# Altium PCB PCB1.PcbDoc
Units mil, origin at the board's own origin, x right, y up, seen from the top; angles counter-clockwise.
Board outline 1889.76 x 1889.76 mil, 2 copper layers (Top Layer, Bottom Layer); 87 components, 85 nets, 372 pads, 223 vias.
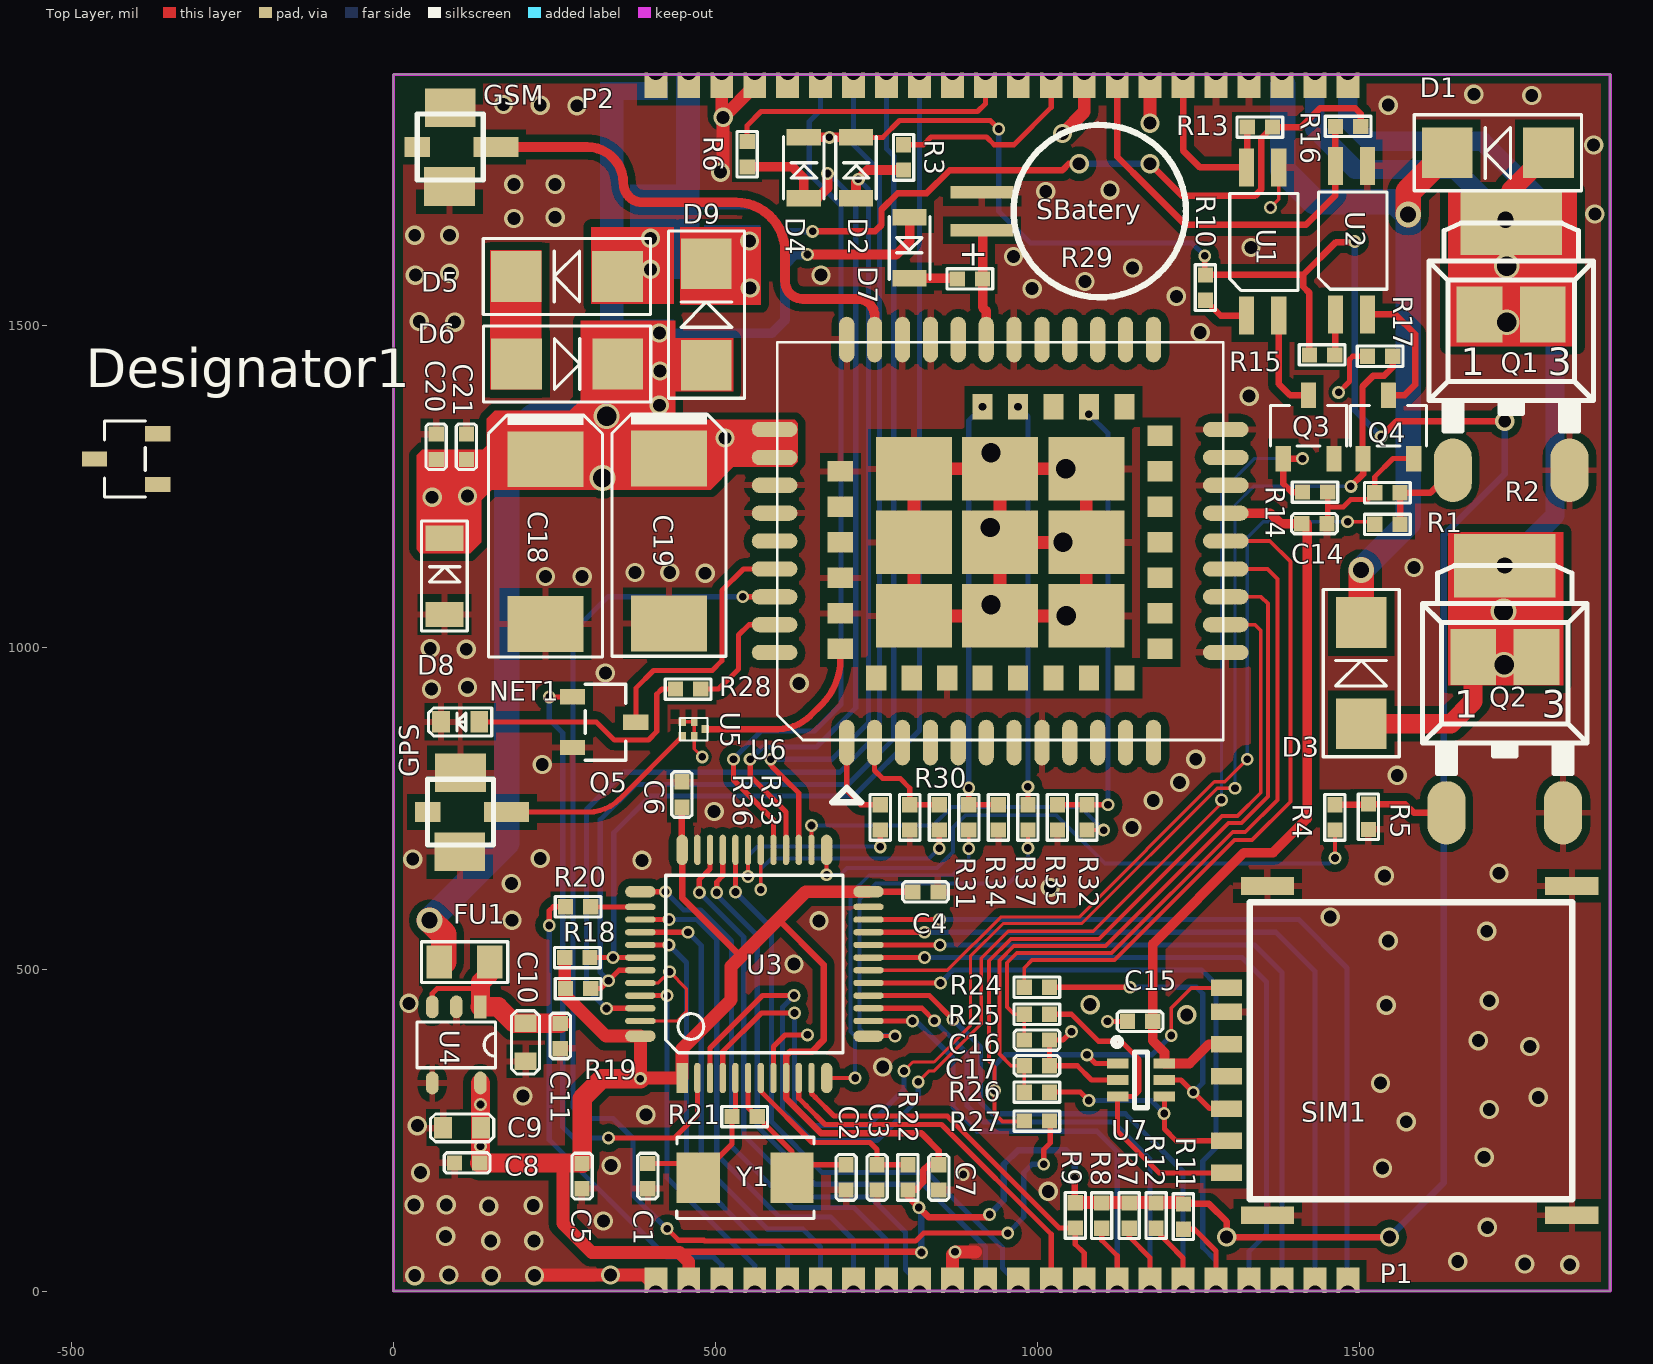
[diagram p0: Top Layer view]
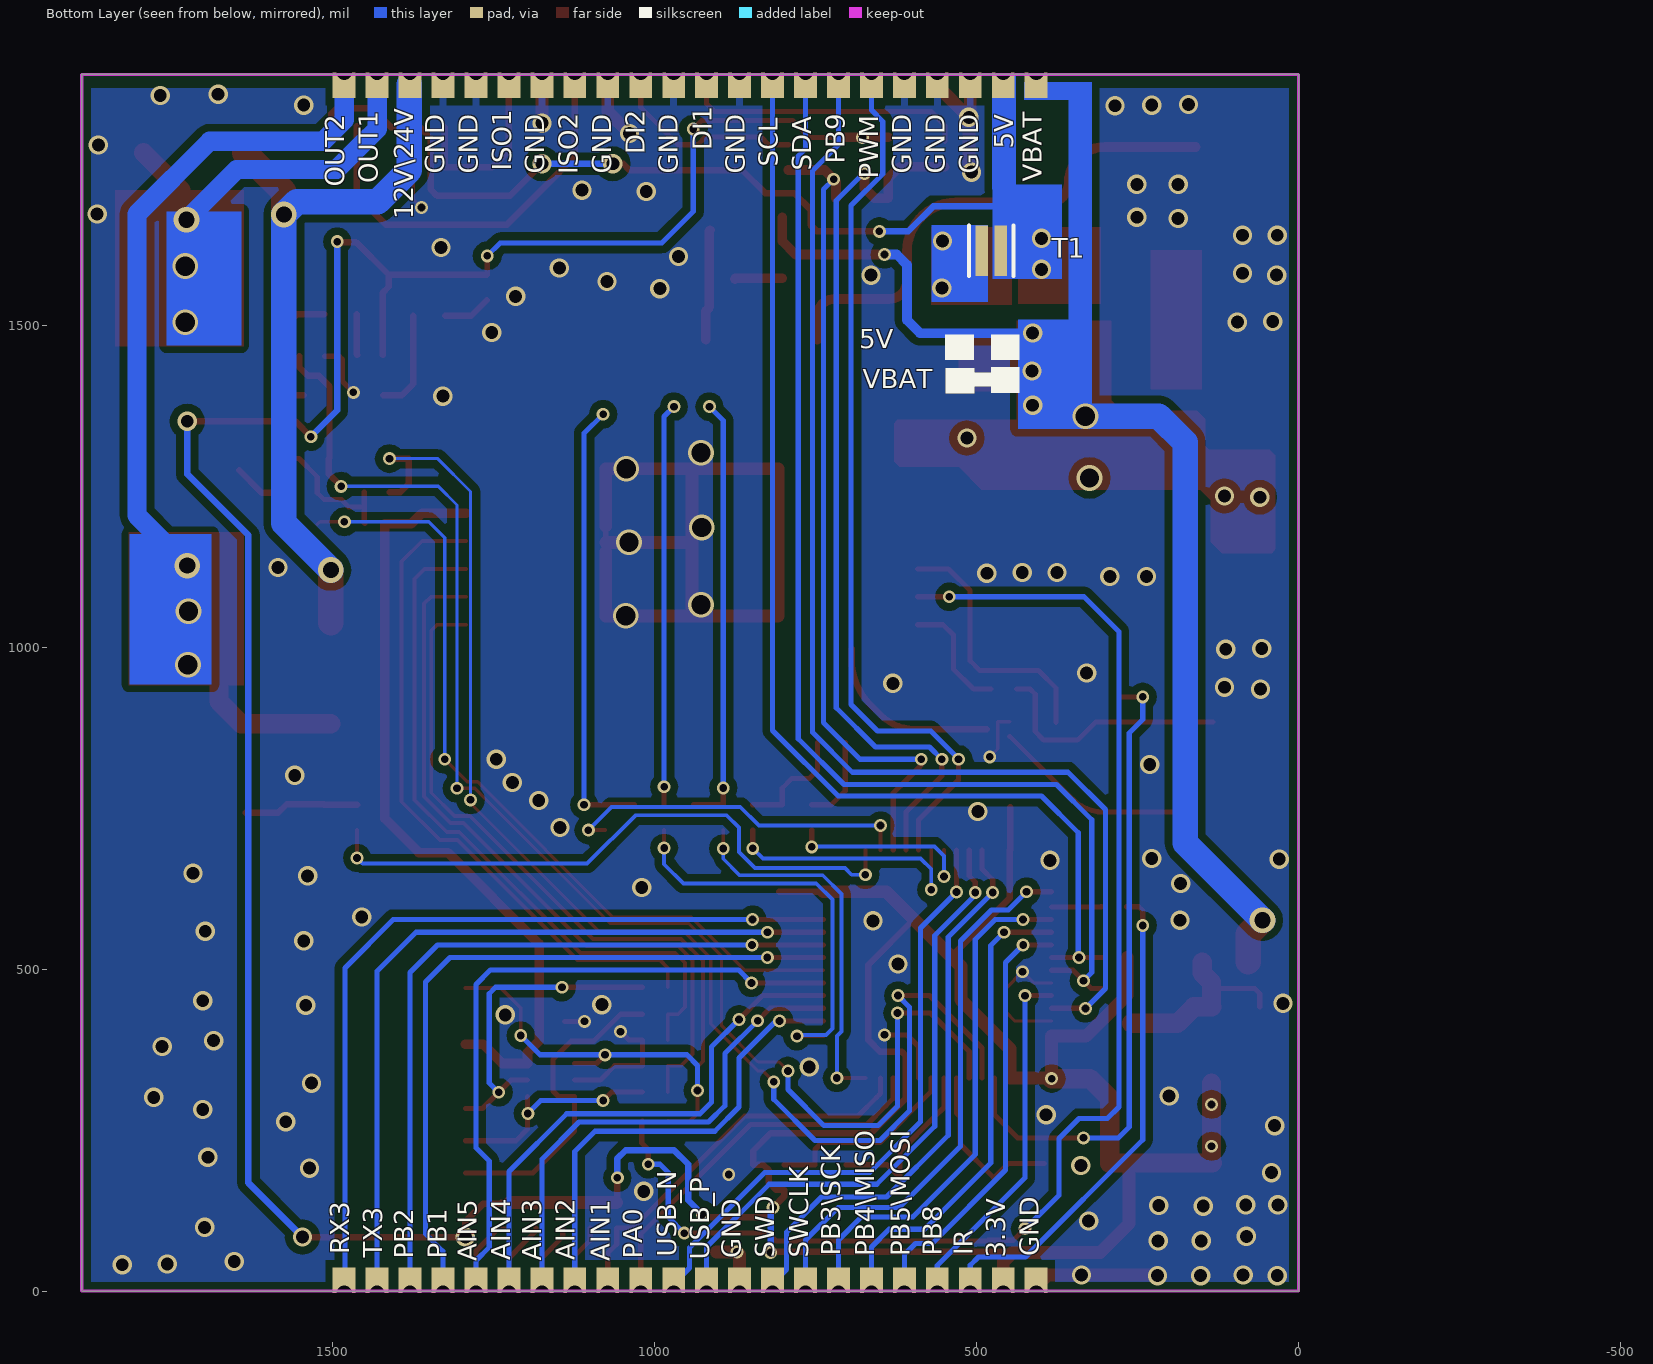
[diagram p1: Bottom Layer view, seen from below]

## Layer stack, top to bottom
Top Layer: signal copper 1.4
Dielectric: dielectric 12.6, FR-4, Dk 4.8
Bottom Layer: signal copper 1.4

## Board outline
0,0 1889.76,0 1889.76,1889.76 0,1889.76

## Design rules (kind name [scope] priority, off if disabled: settings)
Clearance Clearance_2 [InPolygon  And InNet(GSM_ANT)] p1: gap=25
Clearance Clearance_1 [InPolygon And InNet(GND)] p2: gap=12
Clearance [All] p3: gap=5
DiffPairsRouting [All] p1: maxlimit=10 minlimit=10 mostfreqgap=10 maxuncoupledlength=500
MinimumSolderMaskSliver [All] p1: minsoldermaskwidth=2
PolygonConnect PolygonConnect_1 [IsVia And InNet(GND)] p1: connectstyle=Direct reliefconductorwidth=10 reliefentries=4 polygonreliefangle="90 Angle"
PolygonConnect [All] p2: connectstyle=Relief reliefconductorwidth=10 reliefentries=4 polygonreliefangle="90 Angle"
RoutingVias [All] p1: holewidth=28 width=50 viastyle="Through Hole" minholewidth=28 minwidth=50 maxholewidth=28 maxwidth=50
SilkscreenOverComponentPads [All] p1: minsilkscreentomaskgap=1
SolderMaskExpansion [All] p1: expansion=4
Width [All] p1: maxlimit=200 minlimit=5 preferedwidth=10
25 further rules are at their usual default settings.

## Classes and differential pairs
component class POWER: C8 C9 C10 C11 D5 D6 D9 FU1 T1 U4
component class GSM: C14 C15 C16 C17 C18 C19 C20 C21 D7 D8 GPS GSM NET1 Q5 R24 R25 R26 R27 R28 R29 R30 R31 R32 R33 R34 R35 R36 R37 SBatery SIM1 U5 U6 U7
component class cpu: C1 C2 C3 C4 C5 C6 C7 R18 R19 R20 R21 R22 U3 Y1
component class Connector: D1 D2 D3 D4 P1 P2 Q1 Q2 Q3 Q4 R1 R2 R3 R4 R5 R6 R7 R8 R9 R10 R11 R12 R13 R14 R15 R16 R17 U1 U2
differential pair USB: +USB_P -USB_N

## Components (designator, comment, footprint, x,y, rotation, side; value= is the part's Value field where it differs from the comment)
C1 "22pF" 0402C 395,159 r90 top
C2 "22pF" 0402C 703,157 r90 top
C3 "100nF" 0402C 751,157 r90 top
C4 "100nF" 0402C 846,620 r180 top
C5 "100nF" 0402C 293,159 r90 top
C6 "100nF" 0402C 448,791 r270 top
C7 "100nF" 0402C 847,157 r90 top
C8 "0.1uF/10V" 0402C 134,199 r180 top
C9 "10uF/10V" 0603C 77,253.49 r0 top
C10 "10uF/10V" 0603C 205,356.86 r90 top
C11 "0.1uF/10V" 0402C 259,415.86 r270 top
C14 "220nF/10V" 0402C 1450,1192 r180 top
C15 "33pF/10V" 0402C 1140,419 r0 top
C16 "22pF/10V" 0402C 979.63,390 r0 top
C17 "22pF/10V" 0402C 979.63,350 r0 top
C18 "1000uF/6.3V" 7343 236,1292 r270 top
C19 "1000uF/6.3V" 7343 428,1293 r270 top
C20 "33pF/10V" 0402C 66.25,1291.81 r90 top
C21 "10pF/10V" 0402C 113.25,1291.81 r90 top
D1 "1N4004" SMA 1794,1768 r180 top
D2 "1N4148" sod323#1 718.29,1697.54 r90 top
D3 "1N4004" SMA 1503,881 r90 top
D4 "1N4148" sod323#1 637.29,1697.54 r90 top
D5 "SS24" SMA 348,1576 r180 top
D6 "SS24" SMA 191,1440 r0 top
D7 "1N4148" sod323#2 801.63,1667.75 r270 top
D8 "MMSZ5231BT1G" SOD123 79,1051 r90 top
D9 "SS24" SMA 486,1438 r90 top
Designator1 "Comment" SOT23-3 -366,1253 r0 top
FU1 "500mA/6V" 0805R 71,511 r0 top
GPS "IPX" IPX 103,693 r270 top (schematic designator GSM_ANT)
GSM "IPX" IPX 87,1726 r270 top (schematic designator GSM_ANT1)
NET1 "LED" 0603LED 133,884 r180 top
P1 "Header 22" pcb_module_a 407.48,0 r0 top locked
P2 "Header 22" pcb_module_a 1482.28,1889.76 r180 top locked
Q1 "NCE4060K" TO-252-3S 1736,1521 r0 top
Q2 "NCE4060K" TO-252-3S 1726,989 r0 top
Q3 "S8050" SOT23-3 1382,1293 r270 top
Q4 "S8050" SOT23-3 1506,1293 r270 top
Q5 "S8050" SOT23-3 278,923 r180 top
R1 "22R" 0402R 1524,1191 r0 top
R2 "470K" 0402R 1524,1240 r0 top
R3 "10K" 0402R 792.29,1780.54 r270 top
R4 "22R" 0402R 1462.25,716 r90 top
R5 "470k" 0402R 1514.25,717 r90 top
R6 "10K" 0402R 549.29,1785.54 r270 top
R7 "10K" 0402R 1142.67,97.63 r90 top
R8 "10K" 0402R 1100,97.63 r90 top
R9 "10K" 0402R 1059,98 r90 top
R10 "100" 0402R 1261,1539 r90 top
R11 "10K" 0402R 1227,96 r90 top
R12 "10K" 0402R 1184.33,137 r270 top
R13 "10K" 0402R 1326,1808 r0 top
R14 "10K" 0402R 1451,1241 r180 top
R15 "100" 0402R 1462,1454 r180 top
R16 "10K" 0402R 1463,1809 r0 top
R17 "10K" 0402R 1512.63,1452 r0 top
R18 "2K" 0402R 266,518 r0 top
R19 "2K" 0402R 267,470 r0 top
R20 "100" 0402R 267,597 r0 top
R21 "1MR" 0402R 565,271 r180 top
R22 "10K" 0402R 799,157 r90 top
R24 "10R/5%" 0402R 1019,472 r180 top
R25 "10R/5%" 0402R 1019,430 r180 top
R26 "10R/5%" 0402R 1019,309 r180 top
R27 "10K" 0402R 979.63,264 r0 top
R28 "1K" 0402R 438,935 r0 top
R29 "1k%" 0402R 915,1572 r180 top
R30 "10K" 0402R 847.71,716 r90 top
R31 "10K" 0402R 893.57,716 r90 top
R32 "10K" 0402R 1077,716 r90 top
R33 "140K" 0402R 801.86,755.37 r270 top
R34 "140K" 0402R 939.43,755.37 r270 top
R35 "140K" 0402R 1031.14,755.37 r270 top
R36 "1K" 0402R 756,755.37 r270 top
R37 "1K" 0402R 985.29,755.37 r270 top
SBatery "SBatery" MS621FE 914,1677 r180 top
SIM1 "nano sim" "Nano SIM" 1294,471 r90 top
T1 "TEST_P" "TP_High PWR" 492,1616 r180 bottom
U1 "EL3H7C" EL3H7C 1325,1515 r180 top
U2 "EL3H7C" EL3H7C 1463,1517 r180 top
U3 "STM32F103C8T6" TQFP-48 472,331 r90 top
U4 "TLV70233DBVR" SOT23-5(DBV) 135,441.49 r270 top
U5 "SAFFB1G56KB0F0A" SAFFB1G56KB0F0A 484,873 r180 top
U6 "SIM868E/SIM68" SIM868 704,852 r90 top
U7 "SMF05C" SC70-6L 1161,328 r0 top
Y1 "8MHz" CRAY_5032 619,176 r180 top

## Footprints (in the part's own frame and the unit in brackets; to place one, negate y for a bottom-side part, rotate by r counter-clockwise, add the part's x,y. Pads: shape width x height; smd on the part's side, far side on the other; paste and mask are expansions set on the pad)
0402C [mm]
  rect 0.6x0.6 smd: 1(0,0) 2(1,0)
  silkscreen extent -0.4,-0.4 1.4,0.4
0402R [mm]
  rect 0.6x0.6 smd: 1(0,0) 2(1,0)
  silkscreen extent -0.4,-0.4 1.4,0.4
0603C [mm]
  rect 0.7x0.85 smd: 1(0,0) 2(1.5,0)
  silkscreen extent -0.5,-0.55 2,0.55
0603LED [mm]
  rect 0.7x0.85 smd: 1(0,0) 2(1.5,0)
  silkscreen extent -0.5,-0.55 2,0.55
0805R [mm]
  rect 1x1.3 smd: 1(0,0) 2(2,0)
  silkscreen extent -0.7,-0.8 2.7,0.8
7343 [mm]
  rect 2.2x3 smd: 1(0,0) 2(6.5,0)
  silkscreen extent -1.75,-2.25 7.8,2.25
CRAY_5032 [mm]
  rect 1.7x2 smd: 1(0,0) 2(3.7,0)
  silkscreen extent -0.86,-1.6 4.55,1.6
EL3H7C [mm]
  rect 0.6x1.5 smd: 1(0,0) 2(-1.27,0) 3(-1.27,-5.85) 4(0,-5.85)
  silkscreen extent -2.03,-4.83 0.67,-0.99
IPX [mil]
  rect 60x78.74 smd: 1(10.36,0) 3(-112,1)
  rect 31.5x70 smd: 2(-51,72.36)
  rect 31.5x39.37 smd: ""(-51,-50)
  silkscreen extent -102,-50 0,52
MS621FE [mm]
  rect 2.5x0.5 smd: 1(0,-0.749) 2(0,0.749)
  silkscreen extent -8.05,-3.41 -1.25,3.39
"Nano SIM" [mm]
  rect 0.7x2.1 smd: 0(-8.97,-1.615) 0(-8.97,-13.615) 0(4.02,-1.615) 0(4.02,-13.615)
  rect 0.65x1.23 smd: 1(-2.22,0) 2(-4.76,0) 3(-7.3,0) 5(-0.95,0) 6(-3.49,0) 7(-6.03,0) 8(0,0)
  silkscreen extent -8.33,-13.64 3.38,-0.91
pcb_module_a [mm]
  rect 0.9x1 hole 0.6 copper offset 0,0.5: 1(0,-0.076) 2(1.3,-0.076) 3(2.6,-0.076) 4(3.9,-0.076) 5(5.2,-0.076) 6(6.5,-0.076) 7(7.8,-0.076) 8(9.1,-0.076) 9(10.4,-0.076) 10(11.7,-0.076) 11(13,-0.076) 12(14.3,-0.076) 13(15.6,-0.076) 14(16.9,-0.076) 15(18.2,-0.076) 16(19.5,-0.076) 17(20.8,-0.076) 18(22.1,-0.076) 19(23.4,-0.076) 20(24.7,-0.076) 21(26,-0.076) 22(27.3,-0.076)
SAFFB1G56KB0F0A [mm]
  rect 0.3x0.3 smd: 1(0,0)
  rect 0.25x0.35 smd: 2(0.425,-0.288) 5(0.425,0.288)
  rect 0.3x0.35 smd: 3(0.9,-0.288) 4(0.9,0.288)
  silkscreen extent -0.1,-0.44 1,0.46
SC70-6L [mm]
  rect 0.85x0.4 smd: 1(-0.925,0.65) 2(-0.925,0) 3(-0.925,-0.65) 4(0.925,-0.65) 5(0.925,0) 6(0.925,0.65)
  silkscreen extent -1.09,-1.1 0.25,1.65
SIM868 [mm]
  oval 1.8x0.6 smd: 1(0,0) 2(0,-1.1) 3(0,-2.2) 4(0,-3.3) 5(0,-4.4) 6(0,-5.5) 7(0,-6.6) 8(0,-7.7) 9(0,-8.8) 10(0,-9.9) 11(0,-11) 12(0,-12.1) 22(15.9,-12.1) 23(15.9,-11) 24(15.9,-9.9) 25(15.9,-8.8) 26(15.9,-7.7) 27(15.9,-6.6) 28(15.9,-5.5) 29(15.9,-4.4) 30(15.9,-3.3) 31(15.9,-2.2) 32(15.9,-1.1) 33(15.9,0)
  oval 0.6x1.8 smd: 13(3.55,-14.95) 14(4.65,-14.95) 15(5.75,-14.95) 16(6.85,-14.95) 17(7.95,-14.95) 18(9.05,-14.95) 19(10.15,-14.95) 20(11.25,-14.95) 21(12.35,-14.95) 34(12.35,2.85) 35(11.25,2.85) 36(10.15,2.85) 37(9.05,2.85) 38(7.95,2.85) 39(6.85,2.85) 40(5.75,2.85) 41(4.65,2.85) 42(3.55,2.85)
  rect 1x0.8 smd: 43(2.549,-1.159) 44(2.549,-2.559) 45(2.549,-3.959) 46(2.549,-5.359) 47(2.549,-6.759) 48(2.549,-8.159) 49(2.549,-9.559) 50(2.549,-10.959) 58(13.251,-10.959) 59(13.251,-9.559) 60(13.251,-8.159) 61(13.251,-6.759) 62(13.251,-5.359)
  rect 0.8x1 smd: 51(3.7,-12.359) 52(5.1,-12.359) 53(6.5,-12.359) 54(7.9,-12.359) 55(9.3,-12.359) 56(10.7,-12.359) 57(12.1,-12.359) 63(10.7,0.25) 64(9.3,0.25) 65(7.9,0.25) 66(6.5,0.25) 67(5.1,0.25) 68(3.7,0.25)
  rect 2.5x3 smd: 69(5,-2.65) 70(5,-6.05) 71(5,-9.45) 72(7.9,-9.45) 73(10.8,-9.45) 74(10.8,-6.05) 75(10.8,-2.65) 76(7.9,-2.65) 77(7.9,-6.05)
  silkscreen extent -2.35,-14.85 15.8,2.75
SMA [mm]
  rect 2x2 smd: 1(0,0) 2(4,0)
  silkscreen extent -1.3,-1.5 5.3,1.5
SOD123 [mm]
  rect 1x1.5 smd: A(0,0) K(3,0)
  silkscreen extent -0.65,-0.9 3.68,0.9
sod323#1 [mm]
  rect 0.65x1.35 smd: A(0,0) K(2.4,0)
  silkscreen extent -0.03,-0.8 2.44,0.8
sod323#2 [mm]
  rect 0.65x1.35 smd: 1(0,0) 2(2.4,0)
  silkscreen extent -0.03,-0.8 2.44,0.8
SOT23-3 [mm]
  rect 1x0.6 smd: 1(0,0) 2(0,2) 3(-2.5,1)
  silkscreen extent -2.1,-0.5 -0.5,2.5
SOT23-5(DBV) [mm]
  rect 0.9x0.5 smd: 1(0,0)
  oval 0.9x0.5 smd: 2(0,-0.95) 3(0,-1.9) 4(3,-1.9) 5(3,0)
  silkscreen extent 0.6,-2.5 2.4,0.6
TO-252-3S [mm]
  oval 1.5x2.5 smd: 1(-2.3,-6.25) 3(2.3,-6.25)
  rect 1.8x2.2 smd: 2(-1.25,-0.1) 2(1.25,-0.1)
  rect 4x2.5 smd: 2(0,3.5)
  silkscreen extent -3.25,-4.7 3.25,3.5
"TP_High PWR" [mm]
  rect 0.5x2 smd: 1(0,0) 2(0.75,0)
  silkscreen extent -0.5,-1 1.25,1
TQFP-48 [mm]
  rect 1.2x0.45 smd: 1(0,0.6)
  oval 1.2x0.25 smd: 2(0,0) 3(0,-0.5) 4(0,-1) 5(0,-1.5) 6(0,-2) 7(0,-2.5) 8(0,-3) 9(0,-3.5) 10(0,-4) 11(0,-4.5) 26(9,-4.5) 27(9,-4) 28(9,-3.5) 29(9,-3) 30(9,-2.5) 31(9,-2) 32(9,-1.5) 33(9,-1) 34(9,-0.5) 35(9,0)
  oval 1.2x0.45 smd: 12(0,-5.1) 25(9,-5.1) 36(9,0.6)
  oval 0.45x1.2 smd: 13(1.65,-6.75) 24(7.35,-6.75) 37(7.35,2.25) 48(1.65,2.25)
  oval 0.25x1.2 smd: 14(2.25,-6.75) 15(2.75,-6.75) 16(3.25,-6.75) 17(3.75,-6.75) 18(4.25,-6.75) 19(4.75,-6.75) 20(5.25,-6.75) 21(5.75,-6.75) 22(6.25,-6.75) 23(6.75,-6.75) 38(6.75,2.25) 39(6.25,2.25) 40(5.75,2.25) 41(5.25,2.25) 42(4.75,2.25) 43(4.25,2.25) 44(3.75,2.25) 45(3.25,2.25) 46(2.75,2.25) 47(2.25,2.25)
  silkscreen extent 1,-5.75 8,1.25

## Part data
C1 C2 C3 C4 C5 C6 C7: library part CAP, "Capacitor"
C8 C9 C10 C11 C14 C15 C16 C17 C20 C21: library part Cap, "Capacitor"
C18 C19: library part "Cap Pol1", "Polarized Capacitor (Radial)"
D1 D3: library part Diode_2, "Default Diode"
D2 D4: library part Diode, "Default Diode"
D5 D6 D7 D9: library part "Diode 1N4148", "High Conductance Fast Diode"
D8: library part "Diode 10TQ040", "Schottky Rectifier"
FU1: library part FUSE2, "Fuse"
GPS GSM: library part IPEX, "IPEX座"
NET1: library part LED2, "Typical RED, GREEN, YELLOW, AMBER GaAs LED"
P1 P2: "Header, 22-Pin"
Q1 Q2: "NMOSFET"
Q3 Q4 Q5: library part NPN
R1 R2 R3 R4 R5 R6 R7 R8 R9 R11 R12: library part 1K, "CR85-102J"
R10 R13 R14 R15 R16 R17: library part R, "R"
R18 R19 R20 R21 R22: library part Res3, "Resistor"
R24 R25 R26 R27 R30 R31 R32 R33 R34 R35 R36 R37: library part Res2, "Resistor"
R28 R29: library part R
U1 U2: library part Optoisolator1, "4-Pin Phototransistor Optocoupler"
U3: "STM32 ARM-based 32-bit MCU with 64 Kbytes Flash, 48-pin LQFP, Industrial Temperature"
U4: library part TLV70230DBVR
U5: library part SAFFB1G56KBOFA
U6: library part SIM868E/SIM868
Y1: library part XTAL, "Crystal Oscillator"

## Via types
v1: diameter 30, hole 20, Top Layer to Bottom Layer, tented both sides, 117 vias
v2: diameter 20, hole 12, Top Layer to Bottom Layer, tented both sides, 89 vias
v3: diameter 40, hole 30, Top Layer to Bottom Layer, tented both sides, 12 vias
v4: diameter 40, hole 25, Top Layer to Bottom Layer, tented both sides, 5 vias

## Nets (pads, with @x,y where several pads share a name; then routed paths per layer and width w, separated by ;. In a path a pad name is that pad's centre, name@x,y a point inside that pad or via, vN(x,y) a via of type N, cw(c..) or ccw(c..) an arc to the next point about the centre after c; other vN are vias at no path point)
+12V: D1.2 D3.2 P2.3 | length 1141.4
  Top Layer w40: D3.2 v4(1503,1120) ; v4(1576,1672) 1576,1707.48 D1.2
  Bottom Layer w40: P2.3@1381,1874 1381,1741 1430,1692 1556,1692 v4(1576,1672) 1576,1193 v4(1503,1120)
A1: P1.14 R9.1 U3.11 | length 627.2
  Top Layer w8: U3.11 649.17,306.83 655,301 684,272 860,272 1034,98 R9.1 1059,72.83 1072.83,59 P1.14
A2: P1.15 R8.1 U3.14 | length 845.3
  Top Layer w8: U3.14 v2(806,419.58) ; R8.1 1100,79 1124.02,54.98 P1.15
  Bottom Layer w8: v2(806,419.58) 811.42,419.58 869,362 869,286 906.75,248.25 1092.75,248.25 1124.02,216.98 P1.15
A3: P1.16 R7.1 U3.15 | length 903.9
  Top Layer w8: U3.15 820.73,439.27 v2(840,420) ; R7.1 1142.67,84.33 1175.2,51.8 P1.16
  Bottom Layer w8: v2(840,420) 891,369 891,288 916.45,262.55 1117.45,262.55 1175.2,204.8 P1.16
A4: P1.17 R12.2 U3.16 | length 990.8
  Top Layer w8: U3.16 791,458.95 ; 822.95,458.95 791,458.95 ; v2(869,422) 832.05,458.95 791,458.95 ; R12.2 1184.33,93.67 1204.33,73.67 1226.38,51.62 P1.17
  Bottom Layer w8: v2(869,422) 912,379 912,293 929.45,275.55 1136.45,275.55 1226.38,185.62 P1.17
A5: P1.18 R11.1 U3.17 | length 1184
  Top Layer w8: U3.17 v2(849.64,478.64) ; R11.1 1244,96 1277.56,62.44 P1.18
  Bottom Layer w8: v2(849.64,478.64) 870,499 1255,499 1277.56,476.44 1277.56,222.56 1257,202 1257,68 1277.56,47.44 P1.18
BT_ANT: U6.20
CTR_OUT1: R1.1 U3.18 | length 1278
  Top Layer w5: U3.18 860.18,498.32 942.86,581 1065.11,581 1275.11,791 1291,791 v2(1326,826) ; v2(1482,1195) 1520,1195 R1.1
  Bottom Layer w5: v2(1326,826) 1326,1170 1351,1195 v2(1482,1195)
CTR_OUT2: R4.1 U3.25 | length 966.5
  Top Layer w6: v2(672.79,646.75) U3.25 ; v2(1462.25,672.75) R4.1
  Bottom Layer w6: v2(672.79,646.75) 694,646.75 704.25,657 844,657 869,682 869,720 888,739 1030,739 1105,664 1453.5,664 v2(1462.25,672.75)
D_N: U6.24
D_P: U6.25
GND: C1.1 C2.1 C3.1 C4.1 C5.1 C6.1 C7.1 C8.2 C9.1 C10.1 C11.2 C14.1 C15.1 C16.2 C17.2 C18.2 C19.2 C20.2 C21.2 D8.A GPS.1 GPS.3 GSM.1 GSM.3 NET1.2 P1.1 P1.10 P2.4 P2.5 P2.7 P2.9 P2.11 P2.13 P2.18 P2.19 P2.20 Q1.3 Q2.3 Q3.2 Q4.2 Q5.2 R2.1 R5.1 R14.1 R17.1 R33.2 R34.2 R35.2 SBatery.1 SIM1.0 SIM1.5 U1.3 U2.3 U3.8 U3.23 U3.35 U3.44 U3.47 U4.2 U4.4 U5.2 U5.3 U5.5 U6.8 U6.13 U6.19 U6.21 U6.27 U6.30 U6.31 U6.33 U6.36 U6.37 U6.45 U6.63 U6.66 U6.67 U6.69 U6.70 U6.71 U6.72 U6.73 U6.74 U6.75 U6.76 U6.77 U7.2 | length 3072.4
  Top Layer w5: U3.47 440.58,419.58 455,434 455,469.79 v2(428.79,496) 411.43,478.64 U3.44 ; U5.3 U5.2 U5.5 467.27,842 v2(479.47,829.79) ; v2(1362,1683) 1375,1696 U1.3
  Top Layer w8: U3.8 590.11,380.11 608,398 v2(643,398) ; v2(1053,403) 1040,390 C16.2 C17.2 1062,350 1084,328 U7.2 ; U6.72@1076.05,1148 U6.72 U6.72@1076.05,1188 ; v2(1109,419) C15.1 ; C14.1 1451,1193 1451,1218 ; R14.1 1451,1218 ; v2(1468,1396) 1485,1413 1485,1447 1490,1452 R17.1 ; Q4.2 1552.31,1293 1524,1264.69 R2.1 1513.28,1229.28 1486.55,1229.28 1475.27,1218 1451,1218
  Top Layer w20: v1(219,24) 220,25 v1(337,25) 389,25 407.48,6.52 P1.1 ; v1(508,1738) 512,1742 v1(512,1823) ; P2.20 509.84,1825.16 v1(512,1823) ; P2.19@561.02,1872.26 561.02,1872.02 v1(512,1823) ; P1.10 868.11,57.11 v2(872,61) 904,61 ; v1(1039,1798) 1072.83,1831.83 P2.9 ; U6.72@1076.05,1148 U6.71 U6.70 ; U6.72 U6.77 ; U6.72@1076.05,1188 U6.73 U6.74 ; v1(1175,1814) 1175.2,1814.2 P2.7 ; U6.70 U6.69 U6.76 U6.75 U6.74 ; U6.70 U6.77 ; U6.77 U6.74
  other v1: 33,24 152,24 86,25 1827,41 1757,42 1653,46 151,78 218,78 81,85 1699,99 326,109 148,132 217,133 32,134 82,134 1017,155 42,184 1536,191 338,195 1694,208 37,257 1573,263 392,274 1702,282 1778,301 201,303 1533,323 760,348 1765,380 1685,389 1232,429 1542,444 1082,445 24,447 1702,451 622,508 1545,544 1698,559 661,575 184,576 1455,581 1020,627 183,633 1539,645 1717,649 386,669 30,671 228,672 1147,720 498,745 1180,762 1221,790 1559,801 231,818 1246,826 59,935 115,938 630,944 329,960 113,997 57,998 236,1110 293,1110 484,1115 375,1116 429,1116 1585,1124 1329,1390 1253,1489 95,1505 40,1506 1216,1545 992,1557 1074,1568 34,1578 664,1578 87,1581 1148,1589 963,1607 1332,1621 33,1640 87,1640 187,1666 251,1668 1866,1673 1013,1708 1113,1710 187,1719 251,1719 1864,1780 285,1841 228,1842 1545,1842 171,1843 1768,1857 1678,1859
  other v2: 885,181
  other v3: 1045,1048.85 928,1066 1040,1163.02 927,1186 1044,1277.2 928,1302
GNSS_EN: R32.2 R35.1 U6.59 | length 697.4
  Top Layer w8: R35.1 R32.2 v2(1109.63,755.37)
  Bottom Layer w8: v2(1080,1362) 1109.63,1332.37 v2(1109.63,755.37)
GNSS_EN_IN: R32.1 U3.26 | length 550.2
  Top Layer w6: U3.26 v2(649.17,723.17) ; R32.1 v2(1103,716) v2@1107,720
  Bottom Layer w6: v2(649.17,723.17) 838.17,723.17 867,752 1067,752 v2(1103,716)
GNSS_RXD: R31.2 R34.1 U6.62 | length 673
  Top Layer w8: v2(893.57,781.57) R31.2 R34.1
  Bottom Layer w8: v2(893.57,781.57) 893.57,1352.27 v2(914.99,1373.69)
GNSS_TXD: R37.1 U6.61 | length 624.6
  Top Layer w8: R37.1 v2(985.29,783.29)
  Bottom Layer w8: v2(970.11,1373.69) 985.29,1358.51 v2(985.29,783.29)
GSM_ANT: GSM.2 U6.32 | length 794.1
  Top Layer w15: GSM.2 301,1777 cw(c301,1721) 357,1721 ccw(c387,1721) 387,1691 532,1691 cw(c532,1615) 608,1615 608,1569 ccw(c636,1569) 636,1541 721,1541 cw(c721,1514.69) 747.31,1514.69 U6.32
GSM_RXD: R30.2 R33.1 U6.2 | length 180.9
  Top Layer w8: U6.2 747.31,808.69 760,796 787,796 801.86,781.14 R33.1 R30.2
GSM_TXD: R36.1 U6.1 | length 136
  Top Layer w8: U6.1 704,777 725.63,755.37 R36.1
IIC_SCL: P2.14 R18.2 U3.42 | length 1834.6
  Top Layer w8: R18.2 v2(341,518) U3.42
  Bottom Layer w8: v2@342,518 342,712 399,769 715,769 816.93,870.93 P2.14
IIC_SDA: P2.15 R19.2 U3.43 | length 1908.9
  Top Layer w8: R19.2 322,470 v2(334,482) 350.32,498.32 U3.43
  Bottom Layer w8: v2(334,482) 321.12,494.88 321.12,732.12 376,787 481,787 ; 463.75,787 481,787 ; P2.15 765.75,1774.25 777,1763 777,858 706,787 481,787
IR: P1.3 R20.1 | length 775.2
  Top Layer w8: v2(242,568) 242,591 248,597 R20.1
  Bottom Layer w8: v2(242,568) 242,235 424,53 497,53 509.84,40.16 P1.3
ISO_IO1: Q3.1 R14.2 U3.3 | length 2120.9
  Top Layer w5: v2(815,325) 832,342 840,342 913,415 913,517 955,559 1087,559 v2@1286,758
  Top Layer w8: U3.3 491.68,377.68 573,459 v2(622,459)
  Top Layer w10: R14.2 1395,1241 1382,1254 Q3.1 v2(1412,1293)
  Bottom Layer w5: v2(1286,763) 1286,1242 1337,1293 v2(1412,1293)
  Bottom Layer w8: v2(622,459) 604,441 604,280 650,234 751,234 815,298 v2(815,325)
ISO_IO2: Q4.1 R17.2 U3.4 | length 2186.8
  Top Layer w5: v2(793,342) 806.8,355.8 839.66,355.8 896,412.14 896,520 947,571 1069.25,571 1279.25,781 v2(1307,781)
  Top Layer w8: U3.4 511.37,372 571.37,432 v2(623,432)
  Top Layer w10: v2(1487,1250) 1506,1269 ; 1506,1270 Q4.1 1505,1294 1505,1405 1522,1422 1539,1422 1552,1435 R17.2
  Bottom Layer w5: v2(1307,781) 1307,1221 1336,1250 v2(1487,1250)
  Bottom Layer w8: v2(623,432) 623,287 653,257 737,257 793,313 v2(793,342)
ISO_OUT1: P2.6 R13.1 U1.4 | length 293.8
  Top Layer w10: P2.6 1226.38,1771.62 1252.69,1745.31 U1.4 1326,1746.31 R13.1
ISO_OUT2: P2.8 R16.1 U2.4 | length 639.7
  Top Layer w10: P2.8 1124.02,1761.98 1171.12,1714.88 1230,1656 1317,1656 1417,1656 1463,1702 U2.4 R16.1
NetC1_2: C1.2 R21.2 U3.5 Y1.2 | length 266.5
  Top Layer w8: C1.2 450.96,198.37 Y1.2 525.63,228.3 R21.2 531.05,276.43 U3.5
NetC2_2: C2.2 R21.1 U3.6 Y1.1 | length 275.7
  Top Layer w8: U3.6 550.74,285.26 R21.1 619,217 Y1.1 639.37,196.37 C2.2
NetC3_2: C3.2 R22.2 U3.7 | length 310.1
  Top Layer w8: U3.7 570.43,310.57 650,231 740,231 751,220 C3.2 R22.2
NetC10_2: C10.2 C11.1 FU1.2 U4.1 U4.3 | length 309.1
  Top Layer w8: U4.3 60.2,462.2 68,470 134.74,470
  Top Layer w30: U4.1@134.74,441.75 U4.1 ; FU1.2 149.74,494.24 135,479.5 U4.1 ; C11.1 188.14,415.86 162.51,441.49 U4.1
NetD5_2: D5.2 D6.1
NetD7_2: D7.2 R29.2 | length 74.5
  Top Layer w15: D7.2 874.37,1573.26 R29.2
NetD9_2: D9.2 T1.1
  other v1: 554,1558 553,1631
NetGPS_2: GPS.2 U5.4 | length 319
  Top Layer w8: GPS.2 302.52,744 ccw(c302.52,812.48) 350.94,764.06 U5.4
NetNET1_1: NET1.1 R28.1 | length 383.3
  Top Layer w8: NET1.1 315,884 343,856 396,856 409,869 409,927 417,935 R28.1
NetQ1_1: Q1.1 R1.2 R2.2 | length 145.5
  Top Layer w10: R1.2 R2.2 1610.51,1240 Q1.1
NetQ2_1: Q2.1 R4.2 R5.2 | length 179.2
  Top Layer w10: R4.2 1513.25,755.37 R5.2 1571.63,756.37 1585.06,742.94 Q2.1
NetQ3_3: Q3.3 U1.2 | length 159.6
  Top Layer w10: U1.2 1375,1409 1392.57,1391.43 Q3.3
NetQ4_3: Q4.3 U2.2 | length 213.3
  Top Layer w10: U2.2 1556,1517 1587,1486 1587,1408 1570.43,1391.43 Q4.3
NetR10_1: R10.1 U1.1 | length 73.9
  Top Layer w10: R10.1 1285,1515 U1.1
NetR15_1: R15.1 U2.1 | length 63.4
  Top Layer w10: R15.1 1463,1455 U2.1
NetR20_2: R20.2 U3.38 | length 77.2
  Top Layer w8: R20.2 306.62,596.75 U3.38
NetR24_1: R24.1 SIM1.2 U7.5 | length 516.6
  Top Layer w8: R24.1 v2(1144,472) ; U7.5 1223,328 1267.4,283.6 SIM1.2
  Bottom Layer w8: v2(1144,472) 1247,472 1257,462 1257,323.05 v2@1242.48,308.53
  other v2: 1242.2,308.8
NetR25_1: R25.1 SIM1.3 U7.3 | length 504.2
  Top Layer w8: R25.1 1049,430 1052.87,430 1094.87,388 1130,388 1158,360 1158,311 1149.41,302.41 U7.3 1124.58,248.42 1189.4,183.6 SIM1.3
NetR26_1: R26.1 SIM1.7 U7.4 | length 347.1
  Top Layer w8: R26.1 1067,309 v2(1080,296) ; v2(1197,276) v2@1197.42,276.42 ; U7.4 v2@1197.42,276.42 ; SIM1.7 1262.4,233.6 1215.4,233.6 1197.42,251.58 1197.42,276 v2@1197.42,276.42
  Bottom Layer w8: v2(1080,296) 1177,296 v2(1197,276)
NetR28_2: R28.2 U6.41 | length 186.9
  Top Layer w8: R28.2 505,935 536,966 536,1019 552.07,1035.07 U6.41
NetR29_1: R29.1 SBatery.2 U6.28 | length 172.2
  Top Layer w15: SBatery.2 915,1646.5 R29.1 915,1528 920.54,1522.46 U6.28
NetU5_1: U5.1 U6.68 | length 288.1
  Top Layer w10: U5.1 597,873 ccw(c597,945.43) 648.21,894.21 664.87,910.87 ccw(c594.16,981.58) 694.16,981.58 U6.68
OUT1: D1.1 P2.2 Q1.2 | length 885.9
  Top Layer w30: Q1.2@1686.79,1517.06 1686.79,1609.58 Q1.2@1736,1658.8 ; Q1.2@1785.21,1517.06 1785.21,1609.58 Q1.2@1736,1658.8 ; D1.1 1736,1710 Q1.2@1736,1658.8
  Bottom Layer w30: P2.2@1431,1879 1431,1805 1453,1783 1494,1742 1649,1742 v4(1727,1664)
  other v3: 1729,1505 1729,1592
OUT2: D3.1 P2.1 Q2.2 | length 1600.7
  Top Layer w30: D3.1 1642,881 1676.79,915.79 1676.79,985.06 1676.79,1077.58 v4(1726,1126.8) 1775.21,1077.58 Q2.2@1775.21,985.06
  Bottom Layer w30: P2.1@1482,1877 1482,1819 1515,1786 1691,1786 1804,1673 1804,1204.8 v4(1726,1126.8)
  other v3: 1725,973 1724,1056
PA0: P1.13 U3.10 | length 602.5
  Top Layer w8: U3.10 629.48,299.52 641,288 670,259 851,259 1021.65,88.35 P1.13
PB1: P1.19 U3.19 | length 1144.8
  Top Layer w8: U3.19 v2(824.99,518.01)
  Bottom Layer w8: v2(824.99,518.01) 1317.99,518.01 1356,480 1356,89 1329,62 1329,45.37 ; P1.19 1328.74,62
PB2: P1.20 U3.20 | length 1157.9
  Top Layer w8: U3.20 v2(848.69,537.69)
  Bottom Layer w8: v2(848.69,537.69) 1337.31,537.69 1379.92,495.08 P1.20
PB3: P1.7 U3.39 | length 815.4
  Top Layer w8: U3.39 v2(428.06,577.06)
  Bottom Layer w8: v2(428.06,577.06) 470.94,577.06 502,546 502,212 599,115 679,115 714.57,79.43 P1.7
PB4: P1.6 U3.40 | length 751.9
  Top Layer w8: U3.40 v2(457.38,557.38)
  Bottom Layer w8: v2(457.38,557.38) 478,536.76 478,199 581,96 636,96 663.39,68.61 P1.6
PB5: P1.5 U3.41 | length 676.6
  Top Layer w8: U3.41 v2(427.69,537.69)
  Bottom Layer w8: v2(427.69,537.69) 455,510.39 455,188 568.95,74.05 594.95,74.05 612.2,56.8 P1.5
PB8: P1.4 U3.45 | length 559.9
  Top Layer w8: U3.45 v2(424.95,458.95)
  Bottom Layer w8: v2(424.95,458.95) 424.95,176.05 561.02,39.98 P1.4
PB9: P2.16 U3.46 | length 1920.6
  Top Layer w8: v2(331,439) 331.27,439.27 U3.46
  Bottom Layer w8: v2(331,439) 300,470 300,748 358,806 693,806 755,868 755,1740 714.57,1780.43 P2.16
PWM: P2.17 U3.29 | length 1384.2
  Top Layer w8: v2@530,824 v2(528,826) 528,794 590.11,731.89 U3.29
  Bottom Layer w8: v2@530,828 v2(528,826) 528,826.87 571.13,870 654,870 695,911 695,1686 645.76,1735.24 645.76,1816.76 663.39,1834.39 P2.17
PWRKEY: Q5.3 U6.39 | length 408.8
  Top Layer w8: Q5.3 376.43,936.43 404,964 495,964 510,979 510,1008 510,1088 543.68,1121.68 U6.39
PWRKEY_IN: Q5.1 U3.2 | length 1013.7
  Top Layer w8: v2(242,923) Q5.1 ; v2(334,238) 377,238 ; 364,238 377,238 ; U3.2 472,274 436,238 377,238
  Bottom Layer w8: v2(242,923) 242,888 263,867 263,255 280,238 v2(334,238)
RX3: P1.22 U3.22 | length 1399.9
  Top Layer w8: U3.22 v2(847.94,577.06)
  Bottom Layer w8: v2(847.94,577.06) 1405.94,577.06 1481,502 1481,200 ; 1481,80 1481,200 ; P1.22 1481,-1.72 1481,200
SIMC_CLK: C16.1 R25.2 U6.16 | length 1094.9
  Top Layer w6: C16.1 R25.2 964,430 953,441 953,510 968,525 1115.44,525 1303.44,713 1323,713 1373,763 1373,1106 1357.31,1121.68 U6.16
SIMC_DATA: C17.1 R26.2 U6.15 | length 1124.8
  Top Layer w6: R26.2 C17.1 959,350 941,368 941,513.56 963.44,536 1106,536 1297,727 1317,727 1358,768 1358,1068 1347.62,1078.38 U6.15
SIMC_DET: R27.1 SIM1.8 U6.14 U7.1 | length 1661.3
  Top Layer w6: R27.1@978.89,264 R27.1 978.89,263.26 945.74,263.26 933.45,275.55 v2(933.45,311.55) 933.45,348.55 925,357 925,513.11 958.89,547 1096,547 1287,738 1311,738 1347,774 1347,1026 1337.93,1035.07 U6.14 ; v2(1208,397) 1208,440 1239,471 SIM1.8
  Top Layer w8: v2(1077,367) 1090.41,353.59 U7.1
  Bottom Layer w8: v2(933.45,311.55) 933.45,350.45 950,367 v2(1077,367) 1178,367 v2(1208,397)
SIMC_RST: R24.2 U6.17 | length 1036.7
  Top Layer w6: R24.2 979.63,501.63 992,514 1120,514 1306.5,700.5 1333.5,700.5 1393,760 1393,1133 1361.01,1164.99 U6.17
SW1: D4.A R6.2 U3.28 | length 1402.6
  Top Layer w8: v2(554,826) 554,800 609.8,744.2 U3.28
  Top Layer w15: R6.2 619.47,1746.17 637.29,1728.35 D4.A 658.54,1697.54 674,1713 v2(674,1736)
  Bottom Layer w8: v2(554,826) 573,845 657,845 718,906 718,1608 718,1694 676,1736 v2(674,1736)
SW1_OUT: P2.12 R6.1 | length 457.3
  Top Layer w8: R6.1 549.29,1810.29 571,1832 907,1832 919.29,1844.29 P2.12
SW2: D2.A R3.2 U3.27 | length 1321.8
  Top Layer w8: v2(586,826) 586,817 609,794 ; 588,815 609,794 ; U3.27 629.48,773.52 609,794
  Top Layer w15: D2.A 718.29,1723.29 v2(722,1727) 736.17,1741.17 R3.2
  Bottom Layer w8: v2(586,826) 681,826 738,883 738,1711 v2(722,1727)
SW2_OUT: P2.10 R3.1 | length 317.5
  Top Layer w8: R3.1 823,1780.54 835,1792.54 921,1792.54 933,1780.54 963.54,1780.54 1021.65,1838.65 P2.10
SWCLK: P1.8 U3.37 | length 875.6
  Top Layer w8: U3.37 v2(422.37,620.37)
  Bottom Layer w8: v2(422.37,620.37) 450.74,592 477,592 525,544 525,225 620,130 715,130 765.75,79.25 P1.8
SWD: P1.9 U3.34 | length 896
  Top Layer w8: v2(475,619) 475,639 491.69,655.69 491.69,658 U3.34
  Bottom Layer w8: v2(475,619) 544,550 544,242 640,146 741,146 795,92 795,33.43 816.93,11.5 P1.9
TX3: P1.21 U3.21 | length 1218.3
  Top Layer w8: U3.21 v2(824.62,557.38)
  Bottom Layer w8: v2(824.62,557.38) 1370.62,557.38 1431.1,496.9 P1.21
UART1_RXD: R36.2 U3.31 | length 311
  Top Layer w6: v2(550.74,644) U3.31
  Top Layer w8: v2(756,690) R36.2
  Bottom Layer w6: v2(550.74,644) 550.74,676 565.48,690.74 755.26,690.74 v2(756,690)
UART1_TXD: R30.1 U3.30 | length 412.6
  Top Layer w6: v2(570.43,623.57) U3.30
  Top Layer w8: v2(847.71,687.71) R30.1
  Bottom Layer w6: v2(570.43,623.57) 570.43,655.43 587,672 832,672 v2(847.71,687.71)
UART2_RXD: R37.2 U3.13 | length 637.5
  Top Layer w6: U3.13 v2(779,395.96) ; v2(985.29,688.29) R37.2
  Bottom Layer w6: v2@779,398 734,398 724,408 724,608 749,633 955.29,633 985.29,663 v2(985.29,688.29)
UART2_TXD: R31.1 U3.12 | length 583.7
  Top Layer w6: U3.12 v2(717,331) ; v2(893.57,687.43) R31.1
  Bottom Layer w6: v2(717,331) 717,396 710,403 710,570 710,617 739,646 868,646 893.57,671.57 v2(893.57,687.43)
USB_N: P1.12 U3.32 | length 966.1
  Top Layer w8: v2(531.05,620.05) U3.32
  Bottom Layer w8: v2(531.05,620.05) 587,564.11 587,263 666,184 829.46,184 946.01,67.45 946.01,35.96 970.47,11.5 P1.12
USB_P: P1.11 U3.33 | length 959.1
  Top Layer w8: v2(502,619) 502,635.63 511.37,645 U3.33
  Bottom Layer w8: v2@502,615.17 565,552.17 565,256 655,166 822,166 919.29,68.71 P1.11
VBAT: C18.1 C19.1 C20.1 C21.1 D6.2 D7.1 D8.K D9.1 FU1.1 P2.22 U6.34 U6.35 | length 1562
  Top Layer w15: 653,1610 781,1610 801.63,1630.63 D7.1
  Top Layer w40: v4(56,576) 78,554 FU1.1@78,512
  Bottom Layer w15: v1(413,1488) 588,1488 608,1508 608,1594 624,1610 v2(643,1610)
  Bottom Layer w40: v4(56,576) 176,696 176,1318 217,1359 v3(331,1359)
  other v1: 60,1233 115,1235 515,1325 413,1376 414,1429
  other v3: 324.58,1263
VBUS: U6.26
VCC: D5.1 P2.21 R13.2 R16.2 T1.2 | length 1272.9
  Top Layer w10: v2(651,1646) 748,1646 758,1656 758,1680 783,1705 828,1705 864,1741 1039,1741 1049,1751 ; v1(1175,1751) 1225,1701 1338,1701 1348,1711 1348,1790.63 R13.2 1410,1808 1439,1837 1494,1837 1502.37,1828.63 R16.2
  Bottom Layer w10: 434,1685 567,1685 606,1646 v2(651,1646) ; v1(1065,1751) v1(1175,1751)
  other v1: 399.18,1587 399.18,1635.06
VCC_3.3V: C4.2 C5.2 C6.2 C7.2 C8.1 C9.2 D2.K D4.K P1.2 R7.2 R8.2 R9.2 R10.2 R11.2 R12.1 R15.2 R18.1 R19.1 R22.1 U3.1 U3.9 U3.24 U3.36 U3.48 U4.5 | length 7187.9
  Top Layer w8: D2.K 760.03,1792.03 786,1818 927,1818 v2(940,1805) ; v2(1260,1608) 1260,1579.37 R10.2
  Top Layer w10: 445,61 v2@820,61 ; C6.2 448,685.71 U3.36 448.38,610.62 538.5,520.5 ; 597.54,577.54 668,507.07 668,390 650,372 616,372 609.8,365.8 U3.9 609.8,299.2 664,245 820,245 847,218 C7.2 831.37,196.37 823,188 823,169 811,157 R22.1 799,147 v2(816,130) 831,115 v2@922,115 ; U3.24 806.26,620.37 C4.2 ; v2(1058,176) 1058,138.37 R9.2 ; R11.2@1225.37,137 R11.2@1238,137 ; R11.2@1238,135.37 1266.63,135.37 1294,108 v1(1294,84) v1(1547,84) ; R10.2 1413,1578.37 ; R15.2 1422.63,1550.37 1413,1560 1413,1578.37 ; v2(1493,1630) 1492.37,1629.37 1464,1629.37 1413,1578.37 ; v2(1534,1327) 1558,1351 v1(1726,1351)
  Top Layer w15: D4.K v2(677,1792.03) D2.K
  Top Layer w20: 263,199 263,105 308,60 444,60 458.66,45.34 P1.2 ; R18.1 266,460 330.04,395.96 U3.48 v2@383.42,331 ; v2(383.42,330) v2@383.42,331 ; 579.16,559.16 572,552 ; U3.24 640.37,620.37 597.54,577.54 572,552 ; R9.2 1225,137.37 1225.37,137 R11.2 ; R12.1@1183.96,137.37 R12.1 ; v2@383.42,331 U3.1 448.38,376.38 524.5,452.5 524.5,504.5 572,552
  Top Layer w30: U4.5 v2(135,290) v2(135,225) 135,200 C8.1 263,199 290.63,199 C5.2@293,201.37 ; C5.2 C5.2@293,201.37 ; v2(383.42,330) 324,330 293,299 C5.2@293,201.37
  Bottom Layer w8: v2(940,1805) 940,1677 989,1628 1240,1628 v2(1260,1608)
  Bottom Layer w10: v2(816,130) 820,126 v2(820,60) ; v2(926,119) 948,141 948,197 970,219 1045,219 1058,206 v2(1058,176) ; v2(1493,1630) 1493,1368 v2(1534,1327) ; v1(1547,84) 1631,168 1631,1174 1726,1269 v1(1726,1351)
VDD_EXT: R27.2 U6.40 | length 2099
  Top Layer w8: v2(425.04,96.96) 443,79 481.9,79 483,77.9 811.03,77.9 823.13,90 v2(954,90) ; v2(542.38,1078.38) U6.40 ; v2(1010,197) 1010,220 1020,230 1020,263 R27.2
  Bottom Layer w8: v2@421.5,99.5 372,149 372,237 341,268 297,268 279,286 279,1024 333.38,1078.38 v2(542.38,1078.38) ; v2(954,90) 979,115 979,184.31 991.69,197 v2(1010,197)
VSIM: C14.2 C15.2 SIM1.1 U6.18 U7.6 | length 1213.7
  Top Layer w15: U6.18 1361.7,1208.3 1378,1192 1419,1192 1419,734 1366,681 1321,681 1179.37,539.37 C15.2 1179.37,388.63 1197.42,370.58 U7.6 1236.59,353.59 1266.6,383.6 SIM1.1
pads on no net: Designator1.1 Designator1.2 Designator1.3 GPS. GSM. SIM1.6 U6.3 U6.4 U6.5 U6.6 U6.7 U6.9 U6.10 U6.11 U6.12 U6.22 U6.23 U6.29 U6.38 U6.42 U6.43 U6.44 U6.46 U6.47 U6.48 U6.49 U6.50 U6.51 U6.52 U6.53 U6.54 U6.55 U6.56 U6.57 U6.58 U6.60 U6.64 U6.65

## Polygon pours and split planes (outlines as drawn)
GND on Top Layer "Mid-Layer 1-No Net" (solid, remove dead copper, pour order 1000): -80.45,1888.13 1889.62,1888.13 1893,1884.9 1893,1786.37 1893,1.61 1889.62,-1.63 1886.5,-4.63 74.88,-4.63 -77.32,-4.63 -94,11.37 -80.45,24.37 -80.45,1888.13
GND on Bottom Layer "Mid-Layer 1-No Net" (solid, remove dead copper, pour order 1001): 0.76,1868.37 1890.53,1868.37 1893.76,1865.13 1893.76,1766.61 1893.76,-18.16 1890.53,-21.39 1887.53,-24.39 149.76,-24.39 3.76,-24.39 -12.24,-8.39 0.76,4.61 0.76,1868.37

## Keep-outs
Keep-Out Layer:
  the board outline again, w5

## Other copper
Top Layer:
  rectangle net VBAT: 389,1397 528,1480
  rectangle net NetD9_2: 445,1532 571,1653
  rectangle net NetD5_2: 150,1400 230,1617
  rectangle net VCC: 307,1533 436,1653
  rectangle net OUT1: 1638,1467 1838,1710
  rectangle net OUT2: 1638,941 1817,1179
  region net VBAT: 438,1353 623,1353 628,1348 628,1288 620,1280 528,1280 493,1245 153,1245 136,1228 136,1163 119,1146 41,1146 36,1152 36,1298 45,1307 139,1307 145,1313 145,1355 157,1367 274,1367 291,1384 291,1507 438,1507
Bottom Layer:
  rectangle net NetD9_2: 482,1536 570,1656
  rectangle net VBAT: 321,1339 436,1509
  rectangle net VBAT: 321,1405 357,1878
  rectangle net VBAT: 321,1850 426,1878
  rectangle net VCC: 439,1711 476,1887
  rectangle net VCC: 367,1704 427,1718
  rectangle net VCC: 367,1572 475,1719
  rectangle net OUT1: 1642,1469 1758,1677
  rectangle net OUT2: 1688,942 1816,1176

## Silkscreen, mask and mechanical layers (free items; w line width, h text height)
Bottom Overlay:
  rectangle: 471,1405 518,1427
  rectangle: 433,1395 478,1435
  rectangle: 503,1394 548,1434
  rectangle: 433,1446 478,1486
  rectangle: 504,1446 549,1486
  text "5V" at 433,1774 h50 r270
  text "DI1" at 901.56,1772 h50 r270
  text "DI2" at 1005.18,1766.14 h50 r270
  text "PB9" at 694.86,1750.77 h50 r270
  text "SCL" at 798.48,1746.57 h50 r270
  text "SDA" at 746.67,1739.98 h50 r270
  text "ISO1" at 1212.95,1740.37 h50 r270
  text "GND" at 487.62,1735.35 h50 r270
  text "GND" at 539.43,1735.35 h50 r270
  text "GND" at 591.24,1735.35 h50 r270
  text "GND" at 850.29,1735.35 h50 r270
  text "GND" at 953.9,1735.35 h50 r270
  text "GND" at 1057.52,1735.35 h50 r270
  text "ISO2" at 1109.33,1734.52 h50 r270
  text "GND" at 1161.14,1735.35 h50 r270
  text "GND" at 1264.76,1735.35 h50 r270
  text "GND" at 1316.57,1735.35 h50 r270
  text "PWM" at 642.51,1727.39 h50 r270
  text "VBAT" at 389,1723 h50 r270
  text "OUT1" at 1420.19,1721 h50 r270
  text "OUT2" at 1472,1715.14 h50 r270
  text "12V\24V" at 1365,1665 h50 r270
  text "5V" at 682,1454 h50
  text "VBAT" at 677,1392 h50
  text "RX3" at 1464,57 h50 r270
  text "IR" at 496,56 h50 r270
  text "PB8" at 544,55 h50 r270
  text "PB3\SCK" at 702,55 h50 r270
  text "GND" at 393,54 h50 r270
  text "PB5\MOSI" at 594,54 h50 r270
  text "PB4\MISO" at 649,54 h50 r270
  text "USB_N" at 956,53 h50 r270
  text "3.3V" at 445,52 h50 r270
  text "SWCLK" at 751.21,52.1 h50 r270
  text "SWD" at 804,52 h50 r270
  text "TX3" at 1413.21,51.81 h50 r270
  text "GND" at 856,51 h50 r270
  text "PA0" at 1009,50 h50 r270
  text "PB1" at 1313,50 h50 r270
  text "PB2" at 1365,50 h50 r270
  text "USB_P" at 905,49 h50 r270
  text "AIN2" at 1114,48 h50 r270
  text "AIN4" at 1214,48 h50 r270
  text "AIN3" at 1166,47 h50 r270
  text "AIN1" at 1060,46 h50 r270
  text "AIN5" at 1266,46 h50 r270
Top Solder:
  lines w15.75: 17,612.18 17,61 225,61 ; 17,1061 17,927.95 115,927.95 ; 22,1661 245,1661 245,1731.99 ; 159,612.18 229.54,612.18 ; 229.54,613 229.54,683 ; 245,1814 245,1836.66 345,1836.66 ; 1147,1836.66 1199,1836.66 ; 1637,61 1883.08,61 ; 1867,692.65 1867,910
  lines w20: 22,1362 22,1661 ; 1549,1836.66 1872,1836.66 1872,1607
Bottom Solder:
  rectangle: 1653,943 1815,1176
  rectangle: 1640,1469 1784,1704
Mechanical 1:
  the board outline again, w5

## Text inside footprints (layer, text, board x,y; h text height)
Q1: Top Overlay "1" at 1657.26,1422.57 h43.31; Top Overlay "3" at 1793.09,1422.57 h43.31
Q2: Top Overlay "1" at 1647.26,890.57 h43.31; Top Overlay "3" at 1783.09,890.57 h43.31
SBatery: Top Overlay "+" at 924,1627 h40 r180